# Altium PCB PCB1.PcbDoc (part 2 of 2)
Units mil, origin at the board's own origin, x right, y up, seen from the top; angles counter-clockwise.
Board outline 2362.2 x 2362.2 mil, 2 copper layers (Top Layer, Bottom Layer); 150 components, 103 nets, 538 pads, 377 vias.
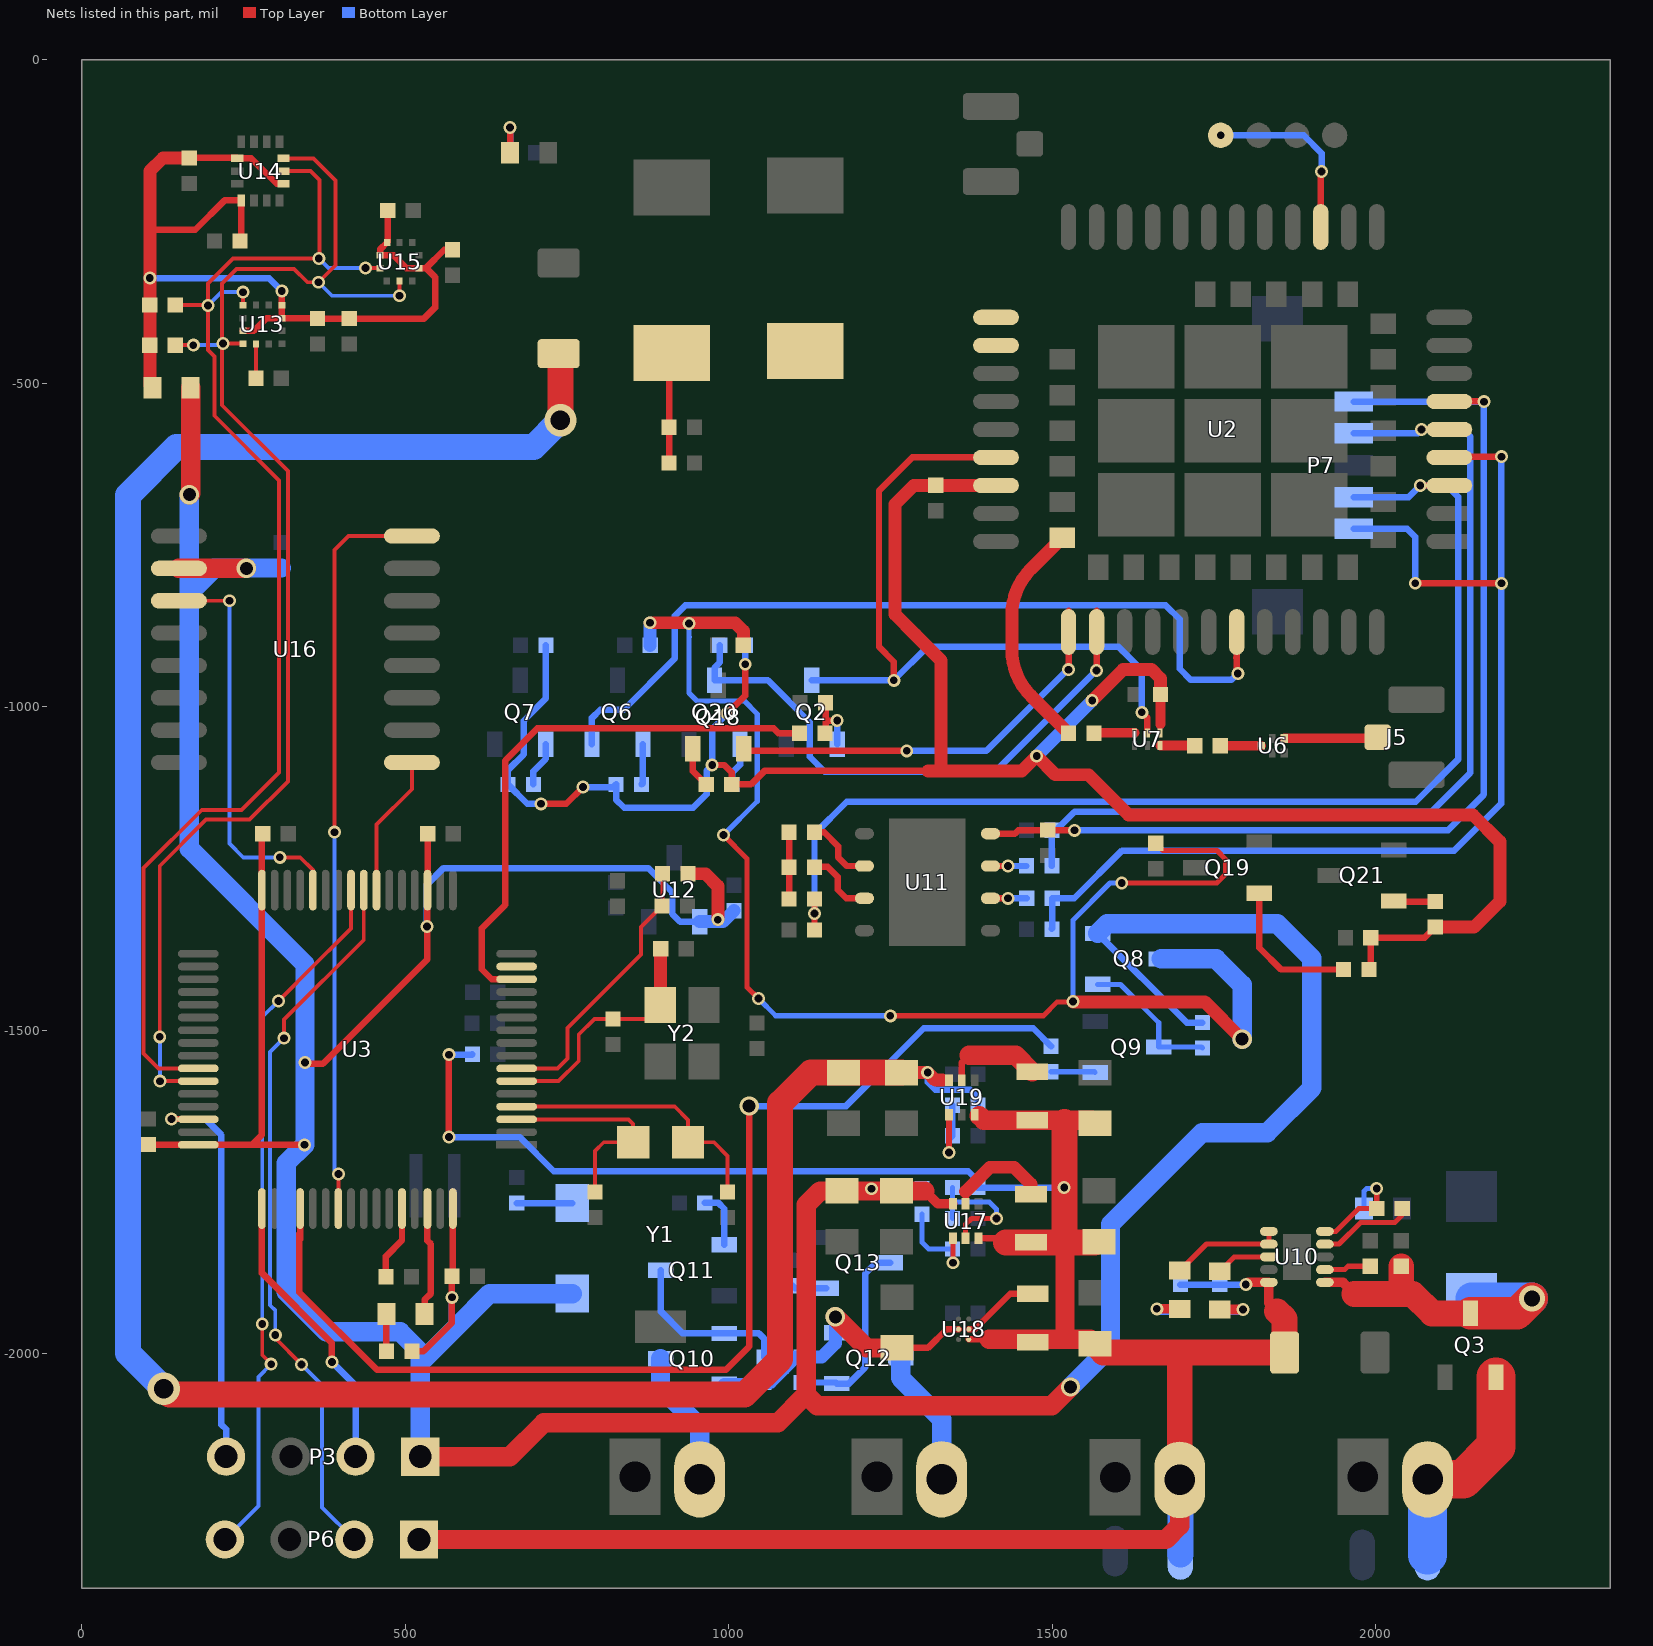
[diagram p2: the nets of this part, all layers, seen from the top]

## Via types
v1: diameter 20, hole 12, Top Layer to Bottom Layer, tented both sides, 367 vias
v2: diameter 30, hole 20, Top Layer to Bottom Layer, tented both sides, 6 vias
v3: diameter 50, hole 30, Top Layer to Bottom Layer, tented both sides, 2 vias
v4: diameter 40, hole 25, Top Layer to Bottom Layer, tented both sides, 1 vias
v5: diameter 25.98, hole 12.99, Top Layer to Bottom Layer, tented top, 1 vias

## Nets (pads, with @x,y where several pads share a name; then routed paths per layer and width w, separated by ;. In a path a pad name is that pad's centre, name@x,y a point inside that pad or via, vN(x,y) a via of type N, cw(c..) or ccw(c..) an arc to the next point about the centre after c; other vN are vias at no path point) (continued)
NetC5_1: C5.1 U3.4 Y1.2 | length 433.6
  Top Layer w6: U3.4@672,-1617.94 916.37,-1617.94 937,-1638.57 Y1.2@937,-1673 976.9,-1673 998,-1694.1 C5.1@998,-1750
NetC6_2: C6.2 R1.2 U3.6 Y2.3 | length 381.8
  Top Layer w6: U3.6@672,-1578.57 736.94,-1578.57 768.07,-1547.44 768.07,-1506.69 792.13,-1482.63 R1.2@821,-1482.63 872.37,-1482.63 Y2.3@894,-1461
  Top Layer w20: Y2.3@894,-1461 894.63,-1460.37 C6.2@894.63,-1374
NetC7_1: C7.1 U3.3 Y1.1 | length 339.3
  Top Layer w6: U3.3@672,-1637.63 845.07,-1637.63 852,-1644.56 Y1.1@852,-1673 806.69,-1673 793,-1686.69 C7.1@793,-1750
NetC8_2: C8.2 R6.2 U3.7 | length 431.4
  Top Layer w6: U3.7@672,-1558.89 735.28,-1558.89 750.91,-1543.27 750.91,-1496.34 864.41,-1382.83 864.41,-1340.22 C8.2@896.63,-1308 897.63,-1307 R6.2@897.63,-1258
NetC20_2: C20.2 U7.6 | length 63.3
  Top Layer w15: C20.2@1564.37,-1041 1565.21,-1040.16 U7.6@1627.31,-1040.16
NetC27_1: C27.1 D2.2 Q3.3 U10.1 | length 486.7
  Top Layer w15: U10.1@1921.31,-1889.56 1949.2,-1889.56 1967.28,-1907.64
  Top Layer w40: 1967.28,-1907.64 2041.61,-1907.64 ; C27.1@2039.37,-1864.76 2039.37,-1905.39 2041.61,-1907.64 ; Q3.3@2146.37,-1937.57 2087.1,-1937.57 2057.17,-1907.64 2041.61,-1907.64
  Top Layer w50: Q3.3@2146.37,-1937.57 2218.28,-1937.57 v4(2241.37,-1914.48)
  Bottom Layer w50: D2.2@2148,-1914.48 v4(2241.37,-1914.48)
NetC40_1: C40.1 U13.5 | length 53
  Top Layer w6: C40.1@269,-492 269.16,-491.84 U13.5@269.16,-439.02
NetD1_2: D1.2 R7.1 | length 86
  Bottom Layer w10: R7.1@672,-1767 D1.2@758,-1767
NetJ5_1: J5.1 U6.4 | length 145.2
  Top Layer w15: U6.4@1858.43,-1048.68 2001.28,-1048.68 J5.1@2002.96,-1047
NetL1_1: L1.1 U7.3 | length 53.4
  Top Layer w15: U7.3@1666.69,-1059.84 1719.84,-1059.84 L1.1@1720,-1060
NetL1_2: L1.2 U6.1 | length 63.6
  Top Layer w15: L1.2@1759.37,-1060 U6.1@1823,-1060
NetL4_1: L4.1 U17.5 | length 161.4
  Top Layer w10: U17.5@1366,-1768 1366,-1749.28
  Top Layer w20: 1366,-1749.28 1403.62,-1711.65 1440.91,-1711.65 1466.99,-1737.74 L4.1@1466.99,-1753.05
NetL5_2: L5.2 U18.B1 | length 121.6
  Top Layer w10: U18.B1@1370.87,-1962 1379.96,-1962 1434.76,-1907.2 L5.2@1469.74,-1907.2
NetL6_1: L6.1 U19.5 | length 151.6
  Top Layer w10: U19.5@1360,-1577 1360,-1549.72 1371.38,-1538.35
  Top Layer w30: 1371.38,-1538.35 1428.43,-1538.35 1443.35,-1538.35 L6.1@1469,-1564
NetLED1_2: LED1.2 R9.1 | length 78.5
  Top Layer w10: LED1.2@661.88,-143.75 v1(661.88,-104.48)
  Bottom Layer w10: R9.1@661.88,-143.75 v1(661.88,-104.48)
NetLED2_1: LED2.1 R29.2 | length 72.8
  Top Layer w15: v1(1661.58,-1930.51) LED2.1@1697.2,-1930.51
  Bottom Layer w15: v1(1661.58,-1930.51) 1663.44,-1932.37 R29.2@1698,-1932.37
NetLED2_2: LED2.2 U10.6 U10.7 | length 174.1
  Top Layer w8: LED2.2@1697.2,-1871.45 1738.16,-1830.5 U10.7@1834.69,-1830.5 U10.6@1834.69,-1810.82
NetLED4_1: LED4.1 R12.2 | length 71.7
  Top Layer w15: LED4.1@1759,-1931.4 v1(1794.62,-1931.4)
  Bottom Layer w15: R12.2@1759,-1932.37 1793.65,-1932.37 v1(1794.62,-1931.4)
NetLED4_2: LED4.2 U10.8 | length 84.9
  Top Layer w8: LED4.2@1759,-1872.34 1781.16,-1850.19 U10.8@1834.69,-1850.19
NetLED5_1: LED5.1 R65.1 | length 57.6
  Top Layer w10: LED5.1@470.67,-1938.58 470.67,-1995.67 R65.1@471,-1996
NetLED5_2: LED5.2 U3.62 | length 169.4
  Top Layer w10: LED5.2@529.72,-1938.58 529.72,-1916.57 539.49,-1906.81 539.49,-1830.39 534.2,-1825.11 U3.62@534.2,-1775.43
NetQ2_1: Q2.1 R10.1 R11.1 | length 101.8
  Top Layer w10: R10.1@1148.51,-1040.78 1149.51,-1039.78 1149.51,-1020.98 ; R11.1@1149.51,-993.78 1149.51,-1020.98 ; v1(1167.5,-1021.16) 1149.69,-1021.16 1149.51,-1020.98
  Bottom Layer w10: Q2.1@1167.5,-1057.51 v1(1167.5,-1021.16)
NetQ6_1: Q6.1 R28.1 | length 63.4
  Bottom Layer w10: R28.1@865,-1120 867.17,-1117.83 Q6.1@867.17,-1057.51
NetQ7_1: Q7.1 R31.1 | length 70.4
  Bottom Layer w10: R31.1@698,-1120 698,-1099.56 717,-1080.56 Q7.1@717,-1057.51
NetQ8_1: Q8.1 Q9.3 R33.2 | length 224.8
  Bottom Layer w8: Q8.1@1570,-1429 1605.22,-1429 1664.43,-1488.2 Q9.3@1664.43,-1525.89 1730.52,-1525.89 R33.2@1732,-1527.37
NetQ9_1: Q9.1 R34.1 | length 68.5
  Bottom Layer w8: R34.1@1498,-1564 1564.74,-1564 Q9.1@1566,-1565.26
NetQ10_1: Q10.1 Q11.3 R36.2 | length 269.3
  Bottom Layer w10: Q11.3@894.45,-1870.94 894.45,-1933.94 928.98,-1968.46 Q10.1@992.87,-1968.46 1046.5,-1968.46 1054.45,-1976.42 R36.2@1054.45,-2005.12
NetQ11_1: Q11.1 R37.1 | length 89.5
  Bottom Layer w10: R37.1@962.95,-1766.81 984.02,-1766.81 992.87,-1775.67 Q11.1@992.87,-1831.57
NetQ12_1: Q12.1 Q13.3 R50.2 | length 300
  Bottom Layer w10: R50.2@1112,-2044.37 1165.37,-2044.37 Q12.1@1167,-2046 1185.77,-2046 1210.63,-2021.14 1210.63,-1876.42 1227.6,-1859.45 Q13.3@1249.25,-1859.45
NetQ13_1: Q13.1 R51.1 | length 54
  Bottom Layer w10: R51.1@1098.46,-1894.92 1102.36,-1898.82 Q13.1@1150.83,-1898.82
NetQ18_1: Q18.1 R40.1 | length 63.6
  Top Layer w10: Q18.1@944.26,-1065 944.26,-1099.26 R40.1@965,-1120
NetQ19_1: Q19.1 R41.1 | length 228.4
  Top Layer w10: Q19.1@1820,-1288 1820,-1372.48 1853.52,-1406 R41.1@1950,-1406
NetQ20_1: Q20.1 R44.1 | length 67.6
  Bottom Layer w10: R44.1@1005,-1120 1005,-1102.01 1017.33,-1089.67 Q20.1@1017.33,-1057.51
NetQ21_1: Q21.1 R45.1 | length 64.4
  Top Layer w10: Q21.1@2028,-1300 2029,-1301 R45.1@2092,-1301
NetR3_1: R3.1 U3.60 | length 115.9
  Top Layer w10: R3.1@470,-1881 470,-1849.49 494.83,-1824.65 U3.60@494.83,-1775.43
NetR13_1: R13.1 U10.2 | length 72.2
  Top Layer w8: U10.2@1921.31,-1869.87 1951.98,-1869.87 1957.09,-1864.76 R13.1@1991.37,-1864.76
NetR14_1: R14.1 R15.2 U10.5 | length 173.7
  Top Layer w8: U10.5@1921.31,-1810.82 1938.11,-1810.82 1973.54,-1775.39 R14.1@2001.37,-1775.39 v1(2001.37,-1744.52)
  Bottom Layer w8: R15.2@1981.69,-1775.39 1981.69,-1748.75 1985.91,-1744.52 v1(2001.37,-1744.52)
NetR14_2: R14.2 U10.4 | length 148.2
  Top Layer w8: U10.4@1921.31,-1830.5 1943.2,-1830.5 1976.66,-1797.04 2029.29,-1797.04 2040.74,-1785.59 R14.2@2040.74,-1775.39
NetR19_2: R19.2 R20.2 U19.1 | length 133.3
  Top Layer w10: v1(1340.32,-1688.82) U19.1@1340.32,-1630.57
  Bottom Layer w10: v1(1340.32,-1688.82) 1340.32,-1668.32 R20.2@1345.63,-1663 R19.2@1345.63,-1616
NetR21_2: R21.2 R48.2 U17.1 | length 153.8
  Top Layer w8: v1(1346.32,-1859.28) U17.1@1346.32,-1821.57
  Bottom Layer w8: R21.2@1298.74,-1784.29 1298.74,-1827.72 1309.02,-1838 R48.2@1345.63,-1838 1345.63,-1858.59 v1(1346.32,-1859.28)
NetR23_2: R23.2 U11.7 | length 49.2
  Top Layer w10: U11.7@1410.44,-1246 v1(1431.59,-1246)
  Bottom Layer w10: v1(1431.59,-1246) R23.2@1459.63,-1246
NetR25_1: R25.1 U11.3 | length 115.2
  Top Layer w10: R25.1@1132.41,-1247 1152.63,-1247 1168.5,-1262.87 1168.5,-1282.91 1181.59,-1296 1194.41,-1296 U11.3@1215.56,-1296
NetR25_2: R25.2 R26.2 R27.2 | length 104
  Top Layer w10: R27.2@1093.04,-1298 1093.04,-1247 R26.2@1093.04,-1194
NetR26_1: R26.1 U11.2 | length 114.7
  Top Layer w10: R26.1@1132.41,-1194 1147.43,-1194 1168.79,-1215.37 1168.79,-1232.38 1182.42,-1246 U11.2@1215.56,-1246
NetR35_2: R35.2 R49.2 U17.2 | length 205.5
  Top Layer w8: U17.2@1366,-1821.57 1366,-1799.75 1374.88,-1790.87 v1@1410.98,-1790.87
  Bottom Layer w8: R35.2@1345.63,-1791 1345.63,-1765.32 ; R49.2@1345.63,-1743 1345.63,-1755.11 1345.63,-1765.32 ; v1(1413.74,-1790.87) 1413.74,-1776.62 1402.44,-1765.32 1345.63,-1765.32
NetR39_2: R39.2 U11.6 | length 50.2
  Top Layer w10: U11.6@1410.44,-1296 v1(1431.59,-1296)
  Bottom Layer w10: v1(1431.59,-1296) R39.2@1460.63,-1296
POWER_CTRL_GPS: R34.2 U3.52 | length 1797.3
  Top Layer w10: 336.22,-1814.17 336.22,-1904.72 456.38,-2024.88 995.28,-2024.88 1031.5,-1988.66 v2(1031.5,-1617.01) ; 337.35,-1822.84 U3.52@337.35,-1775.43
  Bottom Layer w10: v2(1031.5,-1617.01) 1181.14,-1617.01 1301.15,-1497 1470.37,-1497 R34.2@1498,-1524.63
PWRKEY: Q2.3 U2.39 U7.5 | length 1152.3
  Top Layer w10: v1(1255.08,-959.09) 1255.08,-930.2 1232.09,-907.2 1232.09,-665.94 1283.46,-614.57 U2.39@1412.95,-614.57 ; v1(1638.39,-1008.54) 1647,-1017.16 U7.5@1647,-1040.16
  Bottom Layer w10: Q2.3@1128.13,-959.09 v1(1255.08,-959.09) 1307.32,-906.85 1602.01,-906.85 1638.39,-943.23 v1(1638.39,-1008.54)
RF_IN: C20.1 U2.68 | length 362.3
  Top Layer w20: U2.68@1515.31,-738.58 1466.77,-787.13 ccw(c1537.48,-857.84) 1437.48,-857.84 1437.48,-912.06 ccw(c1537.48,-912.06) 1466.77,-982.77 C20.1@1525,-1041
RI: Q6.2 U2.7 | length 1311.2
  Top Layer w10: 1784.61,-924.37 1785,-923.98 ; U2.7@1785,-884.25 1785,-923.98 ; v1(1786.69,-948.43) 1785,-946.73 1785,-923.98
  Bottom Layer w10: Q6.2@788.43,-1057.51 788.43,-1017.12 801.18,-1004.37 837.36,-1004.37 916.73,-925 916.73,-859.25 932.76,-843.23 1675.31,-843.23 1696.89,-864.8 1696.89,-941.14 1714.13,-958.39 1776.73,-958.39 v1(1786.69,-948.43)
RXD3: P6.4 U3.25 | length 1096
  Top Layer w6: v1(278.82,-1954.09) 278.82,-2002.13 v1(292.68,-2015.98) ; v1(303.9,-1454.53) 361.38,-1397.05 398.73,-1359.7 416.09,-1342.33 U3.25@416.09,-1283.3
  Bottom Layer w6: P6.4@221,-2287 272.83,-2235.17 272.83,-2035.83 v1(292.68,-2015.98) ; v1(278.82,-1954.09) 278.82,-1479.61 v1(303.9,-1454.53)
SCL: R22.2 U3.42 U13.1 U14.13 U15.2 | length 2053.3
  Top Layer w6: R22.2@144.38,-379 v1@194.46,-379 ; U3.42@179.87,-1558.89 118.69,-1558.89 95.55,-1535.75 95.55,-1249.03 185.31,-1159.27 246.83,-1159.27 304.8,-1101.31 304.8,-649.87 205.04,-550.12 205.04,-458.54 194.96,-448.46 v1(194.96,-379.84) ; v1@194.96,-378.5 194.96,-345.91 233.86,-307.01 v1(366.3,-307.01) ; U13.1@248.98,-379.47 v1(248.98,-359.09) ; U14.13@311.83,-172 353.1,-172 367.05,-185.94 v1@367.05,-306.26 ; v1(438.42,-321.84) U15.2@460.98,-321.84
  Bottom Layer w6: v1(194.96,-379.84) 215.71,-359.09 v1(248.98,-359.09) ; v1(366.3,-307.01) 381.13,-321.84 v1(438.42,-321.84)
SCLK: U3.55 U16.16 | length 1149
  Top Layer w6: v1(390.47,-1193.78) 390.47,-757.72 412.19,-736 U16.16@510.12,-736 ; U3.55@396.41,-1775.43 396.41,-1722.53 v1(396.65,-1722.28)
  Bottom Layer w6: v1(390.47,-1193.78) 390.47,-1716.1 v1(396.65,-1722.28)
SDA: R24.1 U3.43 U13.4 U14.14 U15.4 | length 2148.8
  Top Layer w6: v1(120.43,-1510.04) 120.43,-1245.88 191.9,-1174.42 259.05,-1174.42 318.35,-1115.12 318.35,-635.39 216.89,-533.94 v1@216.89,-439.8 ; v1(120.62,-1578.57) U3.43@179.87,-1578.57 ; R24.1@144.38,-441 v1(172.31,-441) ; U13.4@248.98,-438.53 v1(218.17,-438.53) v1@216.89,-439.8 ; U14.14@311.83,-152.32 357.98,-152.32 392.17,-186.5 392.17,-317.4 v1(365.79,-343.78) 348.5,-343.78 328.07,-323.35 238.98,-323.35 216.89,-345.43 v1@216.89,-439.8 ; v1(491,-364.58) U15.4@491,-342.02
  Bottom Layer w6: v1(120.43,-1510.04) 120.62,-1510.23 v1(120.62,-1578.57) ; v1(172.31,-441) 215.69,-441 v1(218.17,-438.53) ; v1(365.79,-343.78) 386.59,-364.58 v1(491,-364.58)
SIM_CLK: C17.2 P7.1 R39.1 U2.16 | length 1777.1
  Top Layer w10: v1(2060.98,-809.02) v1@2194.06,-809.02 ; U2.16@2114.65,-613.23 v1@2194.09,-613.23
  Bottom Layer w10: C17.2@1499.37,-1343 1500,-1342.37 R39.1@1500,-1296 1533.92,-1296 1607.76,-1222.17 2121.38,-1222.17 2194.09,-1149.45 2194.09,-697.54 ; P7.1@1966,-725 2048.58,-725 2060.98,-737.4 v1(2060.98,-809.02) ; 2194.09,-642.99 2194.09,-697.54 ; v1@2194.09,-613.23 2194.09,-697.54
  other v1: 2194.09,-809.09 2194.09,-613.39
SIM_DATA: C18.2 P7.2 R27.1 U2.15 | length 1841.9
  Top Layer w10: C18.2@1132.37,-1345 v1(1132.41,-1319.57) R27.1@1132.41,-1297 R27.1@1132.41,-1295.55 ; v1(2068.66,-657.88) U2.15@2113.74,-657.88
  Bottom Layer w10: v1(1132.41,-1319.57) 1132.41,-1196.57 1182.13,-1146.85 2061.77,-1146.85 2127.2,-1081.42 2127.2,-675.47 2109.61,-657.88 v1(2068.66,-657.88) 2050.75,-675.79 P7.2@1966,-675.79
SIM_PWR: R10.2 U3.14 | length 876.4
  Top Layer w10: U3.14@672,-1421.09 633.57,-1421.09 617.95,-1405.47 617.95,-1342.48 654.29,-1306.14 654.29,-1083.07 703.94,-1033.43 1017.58,-1033.43 1069.25,-1033.43 1076.61,-1040.78 R10.2@1109.14,-1040.78
SIM_RST: C16.2 P7.4 R23.1 U2.17 | length 1485.3
  Top Layer w10: v1(2070.67,-571.26) U2.17@2113.74,-571.26
  Bottom Layer w10: R23.1@1499,-1246 R23.1@1499.37,-1245.63 1499.37,-1197 1534.36,-1162.01 2086.26,-1162.01 2146.06,-1102.2 2146.06,-582.17 2135.16,-571.26 v1(2070.67,-571.26) 2064.57,-577.36 P7.4@1966,-577.36
SIM_RST1: U3.15
SIM_RXD: Q20.3 R46.1 U2.2 | length 894.1
  Top Layer w10: v1@1568.47,-943.11 U2.2@1568.47,-884.25 U2.2@1568.47,-851.81
  Bottom Layer w10: R46.1@986,-905 986,-931.36 977.96,-939.4 Q20.3@977.96,-959.09 1060.43,-959.09 1125.16,-1023.82 1125.16,-1077.32 1148.03,-1100.2 1318.95,-1100.2 1411.38,-1100.2 v1@1568.47,-943.11
  other v1: 1568.47,-943.66
SIM_TXD: Q18.2 U2.1 | length 646.8
  Top Layer w10: Q18.2@1023,-1065 1025.99,-1067.99 v1(1275,-1067.99) ; v1(1525.16,-942.6) U2.1@1525.16,-884.25 U2.1@1525.16,-851.81
  Bottom Layer w10: v1(1275,-1067.99) 1398.19,-1067.99 v1@1525.16,-941.02
SIM_VDD: C14.2 P7.5 U2.18 U11.8 | length 1643.8
  Top Layer w10: U11.8@1410.44,-1196 1442.23,-1196 1447.35,-1190.88 1487,-1190.88 v1(1534.46,-1190.88) ; U2.18@2113.74,-527.96 v1@2167.09,-527.96
  Bottom Layer w10: v1(1534.46,-1190.88) 2111.72,-1190.88 2167.13,-1135.47 v1(2167.13,-528.35) ; P7.5@1966,-528.15 2166.93,-528.15 v1(2167.13,-528.35) ; v1@2167.13,-527.96 v1(2167.13,-528.35)
SPI_RESET: U3.28 U16.3 | length 630.7
  Top Layer w6: U16.3@149.88,-836 v1(228.21,-836) ; v1@307.52,-1232.6 337.6,-1232.6 357.04,-1252.04 U3.28@357.04,-1283.3
  Bottom Layer w6: v1(228.21,-836) 228.21,-1211.4 249.41,-1232.6 v1@307.52,-1232.6
  other v1: 305.98,-1232.6
SWCLK: P3.2 U3.49 | length 443.5
  Top Layer w10: U3.49@278.3,-1775.43 278.3,-1875.27 386.57,-1983.54 v1(386.57,-2012.56)
  Bottom Layer w10: v1(386.57,-2012.56) 423,-2048.98 P3.2@423,-2159
SWD: P3.4 U3.46 | length 629.5
  Top Layer w10: v1(138.39,-1637.09) 179.33,-1637.09 U3.46@179.87,-1637.63
  Bottom Layer w10: v1(138.39,-1637.09) 190.94,-1637.09 215.8,-1661.95 215.8,-1970.91 215.8,-2109.46 223,-2116.65 P3.4@223,-2159
TXD3: P6.2 U3.24 | length 1118.8
  Top Layer w6: v1(299,-1971) 299,-1976.01 v1(339.65,-2016.65) ; v1@312.6,-1513.39 v1(312.6,-1512.13) 312.6,-1483.5 435.78,-1360.32 U3.24@435.78,-1283.3
  Bottom Layer w6: v1(299,-1971) 299,-1933 291,-1925 291,-1533.72 v1(312.6,-1512.13) ; v1(339.65,-2016.65) 371.38,-2048.39 371.38,-2237.38 P6.2@421,-2287
VBAT: C44.1 C45.1 C49.1 D4.2 L4.2 L5.1 L6.2 P2.2 P6.1 R2.1 R12.1 R29.1 R49.1 T17.1 U10.10 U17.3 U18.A1 U19.3 | length 4173.7
  Top Layer w10: v1(567.44,-1665) v1(567.44,-1537.6) ; U18.A1@1370.87,-1977.75 1402.61,-1977.75 ; U17.3@1386,-1821.57 1410.87,-1821.57 1417.14,-1827.85 1428.23,-1827.85 ; L4.2@1466.99,-1827.85 L4.2@1469,-1827.85
  Top Layer w15: v1(1799.09,-1893) 1802.53,-1889.56 U10.10@1834.69,-1889.56 1834.69,-1921.74 1847.24,-1934.29
  Top Layer w30: P6.1@521,-2287 1675.65,-2287 1697,-2265.65 P2.2@1697,-2194.94 ; 1387.17,-1631.75 1394.22,-1638.8 L6.2@1469,-1638.8 1560.8,-1638.8 C49.1@1566,-1644 ; 1402.61,-1977.75 1519.57,-1977.75 ; 1519.57,-1828.88 1519.57,-1977.75 ; C45.1@1566,-1984.74 1559.01,-1977.75 1519.57,-1977.75
  Top Layer w40: 1428.23,-1827.85 L4.2@1466.99,-1827.85 ; L4.2@1469,-1827.85 1518.54,-1827.85 ; 1518.54,-1641.91 1518.54,-1827.85 ; C45.1@1566,-1984.74 1579.26,-1998 D4.2@1859,-1998 1859,-1946.05 1847.24,-1934.29 ; C44.1@1566,-1827.05 1565.2,-1827.85 1518.54,-1827.85 ; P2.2@1697,-2194.94 1697,-2000.28
  Bottom Layer w10: v1(567.44,-1665) 676.65,-1665 729.33,-1717.68 1370.12,-1717.68 1385,-1732.56 R49.1@1385,-1743 v1(1518.38,-1743) ; v1(567.44,-1537.6) 603.03,-1537.6 R2.1@603.63,-1537 ; R29.1@1698,-1893 R12.1@1759,-1893 v1(1799.09,-1893)
  Bottom Layer w40: P2.2@1697,-2194.94 1698,-2195.94 T17.1@1698,-2310
VBAT_OUT: C24.2 C29.1 C31.1 C43.2 C47.1 C48.1 D3.2 R19.1 U2.34 U2.35 U19.6 | length 4397.7
  Top Layer w10: C24.2@907.63,-623 C43.2@907.63,-568 907.63,-457.37 C29.1@912,-453
  Top Layer w20: C48.1@1267,-1565.26 v1(1307.39,-1565.26) 1319.13,-1577 1329.88,-1577
  Top Layer w40: v3(126.42,-2054.13) 135.16,-2062.87 1024.49,-2062.87 1079.21,-2008.15 1079.21,-1612.6 1126.55,-1565.26 C47.1@1177,-1565.26 C48.1@1267,-1565.26 ; D3.2@737,-454 739.72,-456.72 v3(739.72,-557.13)
  Bottom Layer w10: v1(1307.39,-1565.26) 1307.39,-1580.46 1318.94,-1592.01 1373.03,-1592.01 1385,-1603.98 R19.1@1385,-1616
  Bottom Layer w40: v3(126.42,-2054.13) 71.5,-1999.21 71.5,-1678.09 71.5,-672.87 145.98,-598.39 394.59,-598.39 ; 631.69,-598.39 394.59,-598.39 ; v3(739.72,-557.13) 698.46,-598.39 394.59,-598.39
VBUS: T1.1 U2.24 | length 249.3
  Top Layer w10: U2.24@1914.92,-225.83 1914.92,-173.82 v1(1916.14,-172.6)
  Bottom Layer w10: v1(1760.27,-116.69) 1888.5,-116.69 1916.14,-144.33 v1(1916.14,-172.6)
VCC_3.3V_S: Q8.3 R30.2 R42.2 R43.2 | length 2488.4
  Top Layer w8: v1(991.65,-1198.15) 1028.27,-1234.76 1028.27,-1433.43 v1(1045.87,-1451.02) ; v1(1249.57,-1477.6) 1486.14,-1477.6 1507.76,-1455.98 1529.72,-1455.98 v1@1532.09,-1455.98 ; v1(1607.36,-1272.44) 1754.17,-1272.44 1767.99,-1258.62 1767.99,-1235.75 ; R43.2@1660,-1210.94 1671.23,-1222.17 1754.41,-1222.17 1767.99,-1235.75 ; 1767.99,-1252.72 1767.99,-1235.75
  Top Layer w20: v1(878.23,-870.08) 1009.65,-870.08 1022.37,-882.8 R42.2@1022.37,-905 ; v1@1532.09,-1455.98 1735.59,-1455.98 v2(1793.27,-1513.66) v2@1789.76,-1510.15
  Bottom Layer w8: v1(938.58,-871.22) 938.58,-892.48 ; 939.02,-892.05 938.58,-892.48 ; v1(991.65,-1198.15) 1043.86,-1145.94 1043.86,-1010.98 1024.09,-991.22 950.98,-991.22 938.58,-978.82 938.58,-892.48 ; v1@1045.85,-1451.04 1072.4,-1477.6 v1(1249.57,-1477.6) ; v1(1532.09,-1455.55) 1532.09,-1329.72 1589.37,-1272.44 v1(1607.36,-1272.44)
  Bottom Layer w20: v1(878.23,-870.08) 878.37,-870.22 R30.2@878.37,-905
  Bottom Layer w30: Q8.3@1668.43,-1389.63 1753.09,-1389.63 1793.27,-1429.8 v2(1793.27,-1513.66)
VCC_3V: C11.2 C12.2 C13.2 C15.2 C28.1 C34.1 C37.1 C50.2 D1.1 FB2.1 P3.1 Q8.2 R6.1 R21.1 R33.1 R65.2 U3.19 U3.32 U3.48 U3.64 U12.1 U16.2 U17.6 | length 7770.7
  Top Layer w10: C13.2@103,-1676.37 103.63,-1677 U3.48@179.87,-1677 262.84,-1677 ; C15.2@279.63,-1196 278.3,-1197.33 U3.32@278.3,-1283.3 278.3,-1661.54 262.84,-1677 ; v1(344.05,-1677) 262.84,-1677 ; v1@344.84,-1551.69 372.56,-1551.69 534.2,-1390.05 U3.19@534.2,-1283.3 534.63,-1282.87 C11.2@534.63,-1196 ; R65.2@510.37,-1996 527.98,-1996 572.05,-1951.93 v1(572.05,-1912.64) C12.2@572.05,-1879.96 573.57,-1878.43 U3.64@573.57,-1775.43
  Top Layer w15: 1303.11,-1748.31 1322.8,-1768 U17.6@1346.32,-1768
  Top Layer w20: R6.1@937,-1258 963.91,-1258 983.03,-1277.13 v1(983.03,-1328.94)
  Top Layer w30: U16.2@149.88,-786 v2(254.15,-786) ; v2(166.18,-672.13) 168,-670.31 FB2.1@168,-507 ; P3.1@523,-2159 661.59,-2159 714.06,-2106.54 1076.06,-2106.54 1119.49,-2063.11 ; 1303.11,-1748.31 C28.1@1259,-1748.31 C34.1@1175,-1748.31 1140.94,-1748.31 1119.49,-1769.76 1119.49,-2063.11 ; v2(1528.15,-2051.3) 1499.29,-2080.16 1136.54,-2080.16 1119.49,-2063.11
  Bottom Layer w10: v1(533.31,-1339.68) 533.31,-1274.88 558.98,-1249.21 875.47,-1249.21 912.68,-1286.42 912.68,-1320.08 924.6,-1332 U12.1@955,-1332 ; v1(572.05,-1912.64) 572.05,-1947.15 581.01,-1956.11 ; v1(1220.67,-1744.92) R21.1@1298.74,-1744.92 ; Q8.2@1570,-1350.26 1707.74,-1488 R33.1@1732,-1488
  Bottom Layer w20: U12.1@955,-1332 991,-1332 C37.1@1008,-1315
  Bottom Layer w30: v2(166.18,-672.13) 166.18,-823.98 ; C50.2@307.93,-785.45 254.7,-785.45 v2(254.15,-786) 204.16,-786 166.18,-823.98 ; v1(344.05,-1677) 316,-1705.05 316,-1904.51 377.49,-1966 380,-1966 492,-1966 531.56,-2005.56 ; v1@344.84,-1677 v1(344.84,-1549.76) 344.84,-1397.87 166.18,-1219.21 166.18,-823.98 ; P3.1@523,-2159 523,-2014.13 ; 523,-2005.56 523,-2014.13 ; D1.1@758,-1907 630.13,-1907 581.01,-1956.11 531.56,-2005.56 ; v2(1528.15,-2051.3) 1589.96,-1989.49 1589.96,-1799.76 1731.34,-1658.39 1831.97,-1658.39 1901.26,-1589.09 1901.26,-1388.82 1847.99,-1335.55 1584.71,-1335.55 Q8.2@1570,-1350.26 ; 523,-2014.13 531.56,-2005.56
VCC_3V_SENSOR: C35.2 C36.2 C38.2 C39.2 C41.2 C42.2 FB2.2 R22.1 R24.2 U13.3 U13.9 U13.10 U14.5 U14.8 U14.12 U15.1 U15.6 U15.10 | length 1631.2
  Top Layer w10: 105.01,-262.68 175.24,-262.68 220.64,-217.28 U14.8@246.47,-217.28 246.47,-277.9 C38.2@244.37,-280 ; C39.2@166,-151.63 239.49,-151.63 U14.5@240.17,-152.32 261.92,-152.32 301.29,-191.68 U14.12@311.83,-191.68 ; U13.3@248.98,-418.84 266,-418.84 285.68,-399.16 U13.9@309.02,-399.16 ; v1(309.02,-357.25) U13.10@309.02,-379.47 U13.9@309.02,-399.16 ; C36.2@472.63,-233 472.63,-281.35 U15.10@472,-281.98 460.98,-293 U15.1@460.98,-302.16 481.76,-302.16 501.45,-321.84 U15.6@521.02,-321.84 532.06,-321.84 ; C35.2@573,-293.63 560.27,-293.63 532.06,-321.84 ; U13.9@309.02,-399.16 363.59,-399.16 C41.2@364.25,-399.82 C42.2@413.25,-399.82 528.84,-399.82 545.87,-382.8 545.87,-342 545.87,-335.65 532.06,-321.84
  Top Layer w20: FB2.2@108.94,-507 105.01,-503.06 R24.2@105.01,-441 R22.1@105.01,-379 105.01,-262.68 105.01,-171.92 125.3,-151.63 C39.2@166,-151.63
  Bottom Layer w10: v1@105.2,-337.52 289.29,-337.52 v1(309.02,-357.25)
  other v1: 105.01,-337.2
VCC_5V: C46.1 Q10.2 Q12.2 R36.1 R50.1 U18.B2 | length 473.3
  Top Layer w10: C46.1@1260,-1991 1307.78,-1991 1336.78,-1962 U18.B2@1355.13,-1962
  Top Layer w30: v2(1164.72,-1942.99) 1212.73,-1991 C46.1@1260,-1991
  Bottom Layer w10: R50.1@1110.75,-2005 R50.1@1112,-2005
  Bottom Layer w20: Q10.2@992.87,-2047.2 1051.73,-2047.2 R36.1@1054.45,-2044.49 1064.13,-2044.49 1085.12,-2023.5 1085.12,-2023.23 R50.1@1103.35,-2005 ; R50.1@1110.75,-2005 R50.1@1103.35,-2005 ; v2(1164.72,-1942.99) 1164.72,-1983.86 1143.58,-2005 R50.1@1112,-2005 R50.1@1103.35,-2005
  Bottom Layer w30: v2(1164.72,-1942.99) v2@1167,-1945.27
VCC_5V1: P5.2 Q10.3 | length 211.2
  Bottom Layer w30: Q10.3@894.45,-2007.83 894.45,-2051.69 955,-2112.24 P5.2@955,-2193.94
VCC_5V2: P4.2 Q12.3 | length 213.6
  Bottom Layer w30: Q12.3@1265.43,-2006.63 1265.43,-2037.24 1329,-2100.81 P4.2@1329,-2193.94
VCC_IN: P1.2 Q3.2 T15.1 | length 351
  Top Layer w60: P1.2@2080,-2193.94 2134.92,-2193.94 2185.74,-2143.12 Q3.2@2185.74,-2036
  Bottom Layer w60: T15.1@2080,-2311 P1.2@2080,-2193.94
VDD_EXT: C19.2 C33.2 R28.2 R31.2 R32.2 R40.2 R41.2 R44.2 R45.2 R46.2 R47.2 U2.40 U7.4 | length 3550.2
  Top Layer w10: v1@708.7,-1149.89 748.85,-1149.89 v1(774.76,-1123.98) ; v1(974.29,-1089.92) 992.91,-1089.92 1004.37,-1101.38 R40.2@1004.37,-1120 1034.17,-1120 1055.12,-1099.06 1307.72,-1099.06 ; v1(997.01,-1010.39) 1025.37,-982.03 ; 1012.24,-996.18 1025.37,-983.06 1025.37,-982.03 ; v1(1025.37,-934.15) 1025.37,-972.43 1025.37,-982.03 ; U2.40@1412.71,-657.63 U2.40@1412.95,-657.88 ; R41.2@1989.37,-1406 1992.37,-1403 R47.2@1992.37,-1357 2075.37,-1357 R45.2@2092,-1340.37
  Top Layer w15: 1666.69,-1027.27 1667.37,-1026.58 C19.2@1667.37,-981
  Top Layer w20: 1307.72,-1099.06 1327.91,-1099.06 ; C33.2@1320,-657.88 1285.82,-657.88 1256.85,-686.85 1256.85,-857.13 1288.21,-888.48 ; C33.2@1320.25,-657.88 U2.40@1412.95,-657.88 ; 1326.97,-927.24 1288.21,-888.48 ; v1(1561.65,-990.2) 1609.53,-942.32 1653.58,-942.32 1667.37,-956.11 C19.2@1667.37,-981 ; R45.2@2092,-1340.37 2152.07,-1340.37 2191.69,-1300.75 2191.69,-1208.39 2150.35,-1167.05 1618,-1167.05 1555.95,-1105 1504.72,-1105 v1(1475.79,-1076.06) 1452.8,-1099.06 1327.91,-1099.06 ; 1288.21,-888.48 1327.91,-928.19 1327.91,-1099.06
  Bottom Layer w10: v1@708.7,-1149.89 688.52,-1149.89 R31.2@658.63,-1120 658.63,-1097.75 682.84,-1073.53 682.84,-1021.41 717.37,-986.88 R32.2@717.37,-905 ; v1(774.76,-1123.98) 821.65,-1123.98 R28.2@825.63,-1120 825.63,-1143.43 838.15,-1155.94 944.72,-1155.94 965.63,-1135.04 R44.2@965.63,-1120 965.63,-1098.58 v1(974.29,-1089.92) 974.29,-1034.13 v1@997.52,-1010.91 ; v1(1025.37,-934.15) R46.2@1025.37,-905
  Bottom Layer w20: v1(1475.79,-1076.06) v1(1561.65,-990.2)
  other v1: 709.76,-1149.89
WP: U3.23 U16.9 | length 219.9
  Top Layer w6: U3.23@455.46,-1283.3 455.46,-1182.02 510.12,-1127.36 U16.9@510.12,-1086
pads on no net: P7. P7.0 U2.3 U2.4 U2.5 U2.9 U2.10 U2.11 U2.12 U2.14 U2.20 U2.22 U2.23 U2.28 U2.29 U2.38 U2.42 U2.43 U2.44 U2.46 U2.47 U2.48 U2.49 U2.50 U2.51 U2.52 U2.53 U2.54 U2.55 U2.56 U2.57 U2.58 U2.59 U2.60 U2.64 U2.65 U3.9 U3.10 U3.11 U3.20 U3.26 U3.27 U3.29 U3.30 U3.33 U3.34 U3.35 U3.36 U3.37 U3.38 U3.39 U3.40 U3.41 U3.51 U3.56 U3.61 U10.9 U11.4 U11.5 U11.9 U13.2 U13.7 U13.11 U13.12 U14.4 U14.9 U14.10 U14.11 U15.7 U16.1 U16.4 U16.5 U16.6 U16.11 U16.12 U16.13 U16.14 Y1.3
copper on no net:
  other v1: 760,-935
  other v5: 1307,-1271

## Polygon pours and split planes (outlines as drawn)
AGND on Top Layer "Mid-Layer 1-No Net" (solid, remove dead copper): -332,123 2779,123 2779,-2125 2274,-2630 2271,-2633 -286,-2633 -286,-2263 -283,-2260 -222,-2199 -222,160
AGND on Bottom Layer "Mid-Layer 1-No Net" (solid, remove dead copper): -163,60 -156,67 2475,67 2475,-2461 2472,-2464 2437,-2429 -188,-2429 -188,-20 -101,67

## Keep-outs
Keep-Out Layer:
  circle w5: c2303.15,-2303.15 r47.24
  circle w5: c2303.15,-59.06 r47.24
  circle w5: c59.06,-59.06 r47.24
  circle w5: c59.06,-2303.15 r47.24
  lines w5: 10.91,-2353.33 10.91,-8 2354,-8 2354,-2353.33 10.91,-2353.33

## Other copper
Top Layer:
  region net VBAT_OUT: 707.36,-420.71 798.58,-420.71 821.06,-398.23 1198.27,-398.23 1245.39,-351.1 1440.47,-351.1 1449.25,-359.88 1449.25,-449.8 1440.47,-458.58 1264.13,-458.58 1221.61,-501.1 712.89,-501.1 699.45,-487.66 699.45,-428.62
  region net NetL5_2: 1491.85,-1893.78 1431.42,-1893.78 1385.67,-1939.53 1385.67,-1957.72 1396.14,-1957.72 1431.06,-1922.8 1492.99,-1922.8 1496.34,-1919.45 1496.34,-1898.27
  region net VCC_5V: 1238.86,-1971.06 1287.76,-1971.06 1294.76,-1978.07 1310.63,-1978.07 1331.61,-1957.09 1336.78,-1957.09 1336.78,-1975.31 1307.09,-2005 1292.2,-2005 1286.65,-2010.55 1244.96,-2010.55 1238.86,-2004.45
Bottom Layer:
  pour cut-out: 211.73,-102.95 212.01,-102.68 319.88,-102.68 335.71,-118.5 335.71,-227.91 328.27,-235.35 218.27,-235.35 211.73,-228.82
  pour cut-out: 214.43,-344.71 214.7,-344.43 322.57,-344.43 338.4,-360.26 338.4,-469.67 330.96,-477.11 220.96,-477.11 214.43,-470.57
  pour cut-out: 429.76,-241.89 430.04,-241.61 537.91,-241.61 553.74,-257.44 553.74,-352 429.76,-352

## Silkscreen, mask and mechanical layers (free items; w line width, h text height)
Top Overlay:
  lines w5: 363.9,-133.58 380,-149.69 ; 395.37,-134.31 380,-149.69 ; 468.82,-61.1 484.92,-45 ; 469.55,-29.63 484.92,-45 ; 485.16,-45 484.92,-45 ; 380,-149.69 380,-149.92 380,-45 484.92,-45
  text "Y" at 522.24,-68.19 h40
  text "X" at 398.07,-203.23 h40
Bottom Overlay:
  text "SWCLK" at 300.52,-1900.02 h30 r90
  text "3.3V" at 360.13,-1902.35 h30 r90
  text "GND" at 240.91,-1905.18 h30 r90
  text "SWD" at 182.41,-1910.38 h30 r90
  text "GND" at 1527,-2159 h30 r90
  text "GND" at 1919,-2163 h30 r90
  text "VBAT" at 1798.48,-2174.55 h30 r90
  text "VBAT" at 650.06,-2219.32 h30 r90
  text "RXD3" at 149.62,-2226.6 h30 r90
  text "GND" at 1236.28,-2260.81 h30 r90
  text "GND" at 868.05,-2262.39 h30 r90
  text "5V2" at 1348.8,-2263.17 h30 r90
  text "5V1" at 979.46,-2266.09 h30 r90
Mechanical 1:
  circle w5: c59.06,-59.06 r47.24
  circle w5: c59.06,-2303.15 r47.24
  circle w5: c2303.15,-2303.15 r47.24
  circle w5: c2303.15,-59.06 r47.24
  lines w5: 0,-2362.2 2362.2,-2362.2 2362.2,0 0,0 0,-2362.2

## Text inside footprints (layer, text, board x,y; h text height)
BATT: Bottom Overlay "+" at 596,-1750 h40 r270